# Altium PCB test.PcbDoc
Units mil, origin at the board's own origin, x right, y up, seen from the top; angles counter-clockwise.
Board outline 6000 x 4000 mil, 2 copper layers (Top Layer, Bottom Layer); 93 components, 47 nets, 214 pads, 0 vias.
Unrouted connection lines stored in the file: 164.
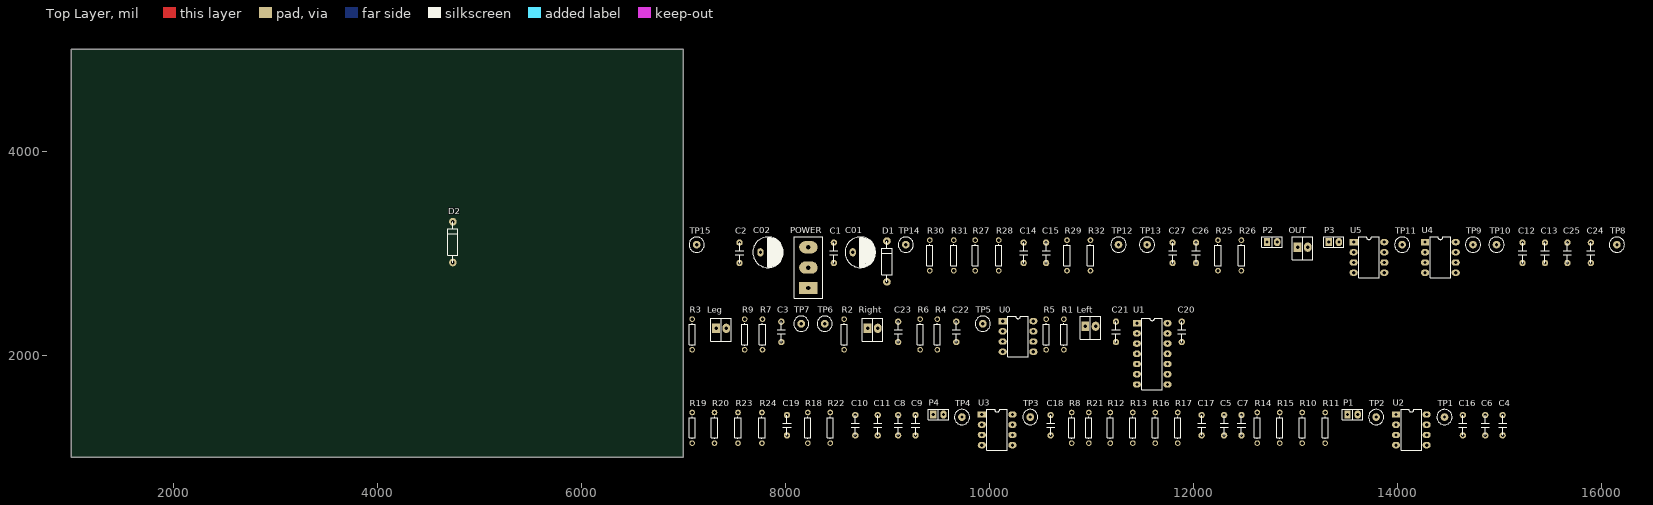
[diagram p0: Top Layer view]
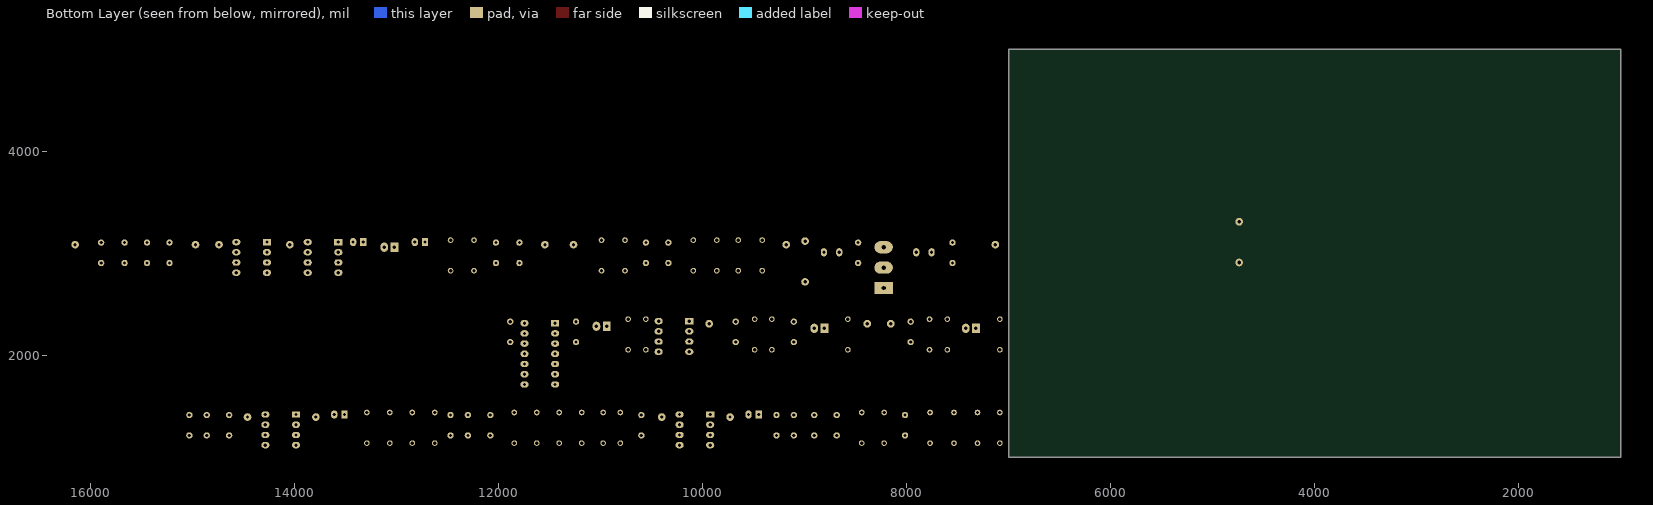
[diagram p1: Bottom Layer view, seen from below]

## Layer stack, top to bottom
Top Layer: signal copper 1.4
Dielectric: dielectric 12.6, FR-4, Dk 4.8
Bottom Layer: signal copper 1.4

## Board outline
1000,1000 7000,1000 7000,5000 1000,5000

## Design rules (kind name [scope] priority, off if disabled: settings)
Clearance [All] p1: gap=10
PolygonConnect [All] p1: connectstyle=Relief reliefconductorwidth=10 reliefentries=4 polygonreliefangle="90 Angle" airgapwidth=10
RoomDefinition rearscript [InComponentClass('rearscript')] p1: confinementstyle=ConfineIn formatcopy=TRUE lockcomponents=FALSE outline 7045,2550 16260,2550 16260,3270 7045,3270
RoomDefinition frontscript [InComponentClass('frontscript')] p2: confinementstyle=ConfineIn formatcopy=TRUE lockcomponents=FALSE outline 7045,1635 12025,1635 12025,2495 7045,2495
RoomDefinition filter [InComponentClass('filter')] p3: confinementstyle=ConfineIn formatcopy=TRUE lockcomponents=FALSE outline 7045,1060 15110,1060 15110,1580 7045,1580
RoutingVias [All] p1: holewidth=28 width=50 viastyle="Through Hole" minholewidth=28 minwidth=50 maxholewidth=28 maxwidth=50
SolderMaskExpansion [All] p1: expansion=4
Width [All] p1: maxlimit=10 minlimit=10 preferedwidth=10
28 further rules are at their usual default settings.

## Classes and differential pairs
component class rearscript: C1 C01 C2 C02 C12 C13 C14 C15 C24 C25 C26 C27 D1 D2 OUT P2 P3 POWER R25 R26 R27 R28 R29 R30 R31 R32 TP8 TP9 TP10 TP11 TP12 TP13 TP14 TP15 U4 U5
component class frontscript: C3 C20 C21 C22 C23 Left Leg R1 R2 R3 R4 R5 R6 R7 R9 Right TP5 TP6 TP7 U0 U1
component class filter: C4 C5 C6 C7 C8 C9 C10 C11 C16 C17 C18 C19 P1 P4 R8 R10 R11 R12 R13 R14 R15 R16 R17 R18 R19 R20 R21 R22 R23 R24 TP1 TP2 TP3 TP4 U2 U3

## Components (designator, comment, footprint, x,y, rotation, side; value= is the part's Value field where it differs from the comment)
C1 "104" C2 8475,2905 r90 top
C01 "220uF" RB.15/.3 8660,3010 r0 top
C2 "104" C2 7550,2905 r90 top
C02 "220uF" RB.15/.3 7755,3010 r0 top
C3 "823" C2 7960,2130 r90 top
C4 "823" C2 15030,1215 r90 top
C5 "823" C2 12300,1215 r90 top
C6 "823" C2 14860,1215 r90 top
C7 "823" C2 12470,1215 r90 top
C8 "105" C2 9105,1215 r90 top
C9 "105" C2 9275,1215 r90 top
C10 "105" C2 8685,1215 r90 top
C11 "105" C2 8905,1215 r90 top
C12 "473" C2 15225,2905 r90 top
C13 "437" C2 15445,2905 r90 top
C14 "473" C2 10335,2905 r90 top
C15 "473" C2 10555,2905 r90 top
C16 "104" C2 14640,1215 r90 top
C17 "823" C2 12080,1215 r90 top
C18 "104" C2 10600,1215 r90 top
C19 "104" C2 8015,1215 r90 top
C20 "104" C2 11885,2130 r90 top
C21 "104" C2 11240,2130 r90 top
C22 "104" C2 9675,2130 r90 top
C23 "104" C2 9105,2130 r90 top
C24 "104" C2 15895,2905 r90 top
C25 "104" C2 15665,2905 r90 top
C26 "104" C2 12025,2905 r90 top
C27 "104" C2 11795,2905 r90 top
D1 "1N4007" DIODE0.4 8995,2720 r90 top
D2 "1N4007" DIODE0.4 4740,2910 r90 top
Left "Header 2" SIP2L 10940,2285 r0 top
Leg "Header 2" SIP2L 7320,2265 r0 top
OUT "Header 2" SIP2L 13020,3060 r0 top
P1 "JUMP-1" SIP2 13510,1420 r0 top
P2 "JUMP-1" SIP2 12720,3110 r0 top
P3 "JUMP-1" SIP2 13325,3110 r0 top
P4 "JUMP-1" SIP2 9450,1420 r0 top
POWER "Header 3" POWER3 8225,2660 r90 top
R1 "50K" AXIAL-0.3 10730,2205 r90 top
R2 "50K" AXIAL-0.3 8575,2205 r90 top
R3 "100K" AXIAL-0.3 7085,2205 r90 top
R4 "5.6K" AXIAL-0.3 9490,2205 r90 top
R5 "24.9" AXIAL-0.3 10555,2205 r90 top
R6 "24.9" AXIAL-0.3 9320,2205 r90 top
R7 "10K" AXIAL-0.3 7775,2205 r90 top
R8 "5.1M" AXIAL-0.3 10805,1290 r90 top
R9 "10M" AXIAL-0.3 7600,2205 r90 top
R10 "18K" AXIAL-0.3 13065,1290 r90 top
R11 "18K" AXIAL-0.3 13290,1290 r90 top
R12 "100K" AXIAL-0.3 11185,1290 r90 top
R13 "56K" AXIAL-0.3 11405,1290 r90 top
R14 "18K" AXIAL-0.3 12625,1290 r90 top
R15 "18K" AXIAL-0.3 12845,1290 r90 top
R16 "100K" AXIAL-0.3 11625,1290 r90 top
R17 "56K" AXIAL-0.3 11845,1290 r90 top
R18 "5.1M" AXIAL-0.3 8220,1290 r90 top
R19 "8.2M" AXIAL-0.3 7085,1290 r90 top
R20 "5.1M" AXIAL-0.3 7305,1290 r90 top
R21 "5.1M" AXIAL-0.3 10975,1290 r90 top
R22 "5.1M" AXIAL-0.3 8440,1290 r90 top
R23 "5.1M" AXIAL-0.3 7535,1290 r90 top
R24 "5.1M" AXIAL-0.3 7770,1290 r90 top
R25 "68K" AXIAL-0.3 12240,2980 r90 top
R26 "68K" AXIAL-0.3 12470,2980 r90 top
R27 "68K" AXIAL-0.3 9860,2980 r90 top
R28 "68K" AXIAL-0.3 10090,2980 r90 top
R29 "200" AXIAL-0.3 10760,2980 r90 top
R30 "1.8K" AXIAL-0.3 9415,2980 r90 top
R31 "47K" AXIAL-0.3 9650,2980 r90 top
R32 "100K" AXIAL-0.3 10990,2980 r90 top
Right "Header 2" SIP2L 8805,2265 r0 top
TP1 "TP-1" tp-1-1 14460,1395 r0 top
TP2 "TP-1" tp-1-1 13790,1395 r0 top
TP3 "TP-1" tp-1-1 10400,1395 r0 top
TP4 "TP-1" tp-1-1 9730,1395 r0 top
TP5 "TP-1" tp-1-1 9935,2310 r0 top
TP6 "TP-1" tp-1-1 8385,2310 r0 top
TP7 "TP-1" tp-1-1 8155,2310 r0 top
TP8 "TP-1" tp-1-1 16150,3085 r0 top
TP9 "TP-1" tp-1-1 14740,3085 r0 top
TP10 "TP-1" tp-1-1 14970,3085 r0 top
TP11 "TP-1" tp-1-1 14045,3085 r0 top
TP12 "TP-1" tp-1-1 11265,3085 r0 top
TP13 "TP-1" tp-1-1 11545,3085 r0 top
TP14 "TP-1" tp-1-1 9180,3085 r0 top
TP15 "TP-1" tp-1-1 7130,3085 r0 top
U0 "AD620AN" DIP8 10130,2335 r0 top
U1 "LM324" DIP14 11445,2315 r0 top
U2 "LM353" DIP8 13985,1420 r0 top
U3 "LM353" DIP8 9925,1420 r0 top
U4 "LM353" DIP8 14270,3110 r0 top
U5 "LF356" DIP8 13570,3110 r0 top

## Footprints (in the part's own frame and the unit in brackets; to place one, negate y for a bottom-side part, rotate by r counter-clockwise, add the part's x,y. Pads: shape width x height; smd on the part's side, far side on the other; paste and mask are expansions set on the pad)
AXIAL-0.3 [mm] "Axial Device, Thru-Hole; 2 Leads; 0.3 in Pin Spacing"
  round 1.4 hole 0.85: 1(-3.81,0) 2(3.81,0)
  silkscreen extent -2.77,-0.76 2.77,0.76
C2 [mil]
  round 62 hole 32: 1(0,0) 2(200,0)
  silkscreen extent 0,-40 200,40, body extent -59,-49 256,49, height 413
DIODE0.4 [mil]
  round 75 hole 35: A(0,0) K(400,0)
  silkscreen extent 0,-50 400,50, body extent -18,-50 418,52, height 130
DIP8 [mil]
  rect 80x62 hole 32: 1(0,0)
  oval 80x62 hole 32: 2(0,-100) 3(0,-200) 4(0,-300) 5(300,-300) 6(300,-200) 7(300,-100) 8(300,0)
  silkscreen extent 50,-350 250,50, body extent -10,-342 298,48, height 180
DIP14 [mil]
  rect 80x62 hole 32: 1(0,0)
  oval 80x62 hole 32: 2(0,-100) 3(0,-200) 4(0,-300) 5(0,-400) 6(0,-500) 7(0,-600) 8(300,-600) 9(300,-500) 10(300,-400) 11(300,-300) 12(300,-200) 13(300,-100) 14(300,0)
  silkscreen extent 50,-650 250,50, body extent -5,-675 305,75, height 165
POWER3 [mil]
  rect 120x180 hole 43: 1(0,0)
  oval 120x180 hole 43: 2(200,0) 3(400,0)
  silkscreen extent -100,-140 500,140, body extent -105,-150 495,189, height 472
RB.15/.3 [mil]
  oval 62x80 hole 32: 1(0,0) 2(150,0)
  silkscreen extent -75,-150 225,150, body extent -82,-159 232,155, height 504
SIP2 [mil]
  rect 62x80 hole 32: 1(0,0)
  oval 62x80 hole 32: 2(100,0)
  silkscreen extent -50,-50 150,50, body extent -50,-50 150,50, height 646
SIP2L [mil]
  rect 75x90 hole 35: 1(0,0)
  oval 75x90 hole 35: 2(100,0)
  silkscreen extent -50,-125 150,100, body extent -96,-134 199,90, height 276
tp-1-1 [mil]
  round 75 hole 32: 1(0,0)
  silkscreen extent -75,-75 75,75, body extent -67,-57 57,67, height 320

## Part data
C1 C2 C3 C4 C5 C6 C7 C8 C9 C10 C11 C12 C13 C14 C15 C16 C17 C18 C19 C20 C21 C22 C23 C24 C25 C26 C27: library part Cap, "Capacitor"
C01 C02: library part "Cap Pol1", "Polarized Capacitor (Radial)"
D1 D2: library part DIODE
Left Leg OUT Right: "Header, 2-Pin"
POWER: "Header, 3-Pin"
R1 R2 R3 R4 R5 R6 R7 R8 R9 R10 R11 R12 R13 R14 R15 R16 R17 R18 R19 R20 R21 R22 R23 R24 R25 R26 R27 R28 R29 R30 R31 R32: library part Res2, "Resistor"
U0: "Low-Cost, Low-Power Instrumentation Amplifier"

## Nets (pads, with @x,y where several pads share a name; then routed paths per layer and width w, separated by ;. In a path a pad name is that pad's centre, name@x,y a point inside that pad or via, vN(x,y) a via of type N, cw(c..) or ccw(c..) an arc to the next point about the centre after c; other vN are vias at no path point)
FF: P1.1 TP5.1 U0.6
FI: P2.1 R21.2 R24.2 TP4.1 U3.7
GND: C1.1 C01.2 C02.1 C2.2 C5.1 C7.1 C16.2 C17.2 C18.2 C19.2 C20.2 C21.2 C22.2 C23.2 C24.2 C25.2 C26.2 C27.2 OUT.2 POWER.2 R12.1 R16.1 R18.1 R19.1 R22.1 R23.1 R30.1 R31.1 TP12.1 TP13.1 U0.5 U1.10
LTOH: C6.2 P4.1 R17.2 TP2.1 U2.7
NetC3_1: C3.1 R3.2 R9.1 TP6.1 U1.8
NetC3_2: C3.2 R7.1 R9.2 U1.9
NetC4_1: C4.1 R10.2 R11.1
NetC4_2: C4.2 R13.2 R14.1 U2.1
NetC5_2: C5.2 R11.2 U2.3
NetC6_1: C6.1 R14.2 R15.1
NetC7_2: C7.2 R15.2 U2.5
NetC8_1: C8.1 P4.2 TP3.1
NetC8_2: C8.2 C9.1 R8.1
NetC9_2: C9.2 R18.2 U3.3
NetC10_1: C10.1 R8.2 R20.2 U3.1
NetC10_2: C10.2 C11.1 R21.1
NetC11_2: C11.2 R22.2 U3.5
NetC12_1: C12.1 P2.2 R25.1 TP8.1
NetC12_2: C12.2 C13.1 R27.2 R28.2
NetC13_2: C13.2 R26.2 U4.3
NetC14_1: C14.1 C15.1 R27.1 R28.1 U4.6 U4.7
NetC14_2: C14.2 C15.2 R25.2 R26.1
NetD1_1: D1.A POWER.1
NetD2_2: D2.K POWER.3
NetLeft_1: Left.1 R1.1
NetLeft_2: Left.2 Leg.2 Right.2 TP7.1 U1.13 U1.14
NetLeg_1: Leg.1 R3.1
NetOUT_1: OUT.1 R32.2 TP11.1 U5.6
NetP1_2: P1.2 R10.1 TP1.1
NetP3_1: P3.1 R29.2 TP9.1 U4.1 U4.2
NetP3_2: P3.2 TP10.1 U5.3
NetR1_2: R1.2 U1.3
NetR2_1: R2.1 Right.1
NetR2_2: R2.2 U1.5
NetR4_1: R4.1 R6.2 U0.8
NetR4_2: R4.2 R5.2 U0.1
NetR5_1: R5.1 R6.1 R7.2 U1.12
NetR12_2: R12.2 R13.1 U2.2
NetR16_2: R16.2 R17.1 U2.6
NetR19_2: R19.2 R20.1 U3.2
NetR23_2: R23.2 R24.1 U3.6
NetR29_1: R29.1 R30.2 U4.5
NetR31_2: R31.2 R32.1 U5.2
NetU0_2: U0.2 U1.6 U1.7
NetU0_3: U0.3 U1.1 U1.2
VCC: C01.1 C1.2 C16.1 C18.1 C20.1 C21.1 C24.1 C27.1 D1.K TP14.1 U0.7 U1.4 U2.8 U3.8 U4.8 U5.7
VEE: C2.1 C02.2 C17.1 C19.1 C22.1 C23.1 C25.1 C26.1 D2.A TP15.1 U0.4 U1.11 U2.4 U3.4 U4.4 U5.4
pads on no net: U5.1 U5.5 U5.8